# Altium PCB LaserControl.PcbDoc
Units mil, origin at the board's own origin, x right, y up, seen from the top; angles counter-clockwise.
Board outline 870 x 540 mil, 2 copper layers (Top Layer, Bottom Layer); 13 components, 8 nets, 34 pads, 0 vias.
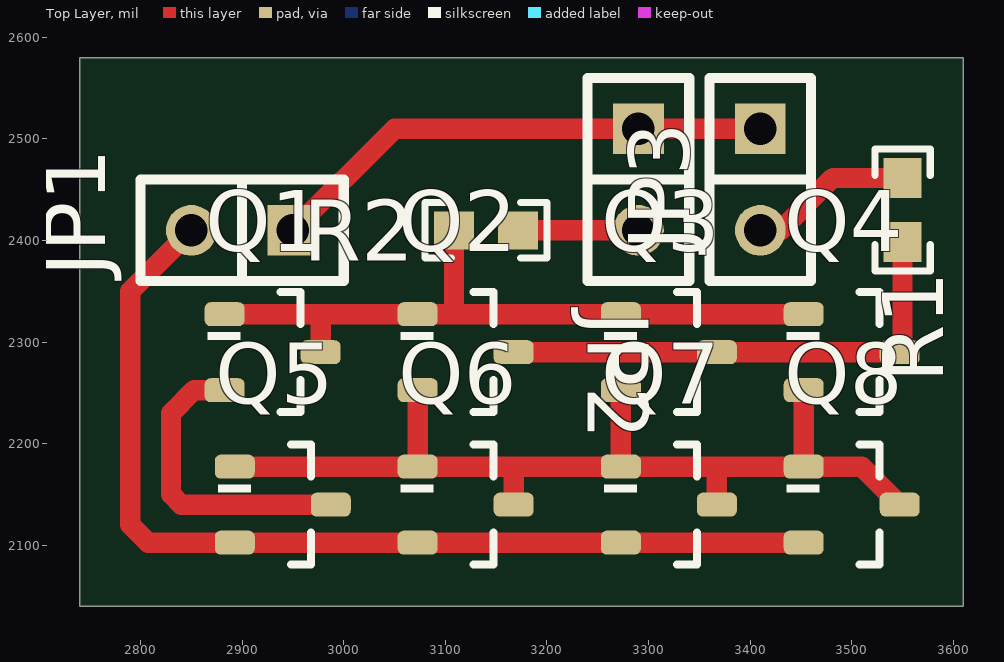
[diagram p0: Top Layer view]
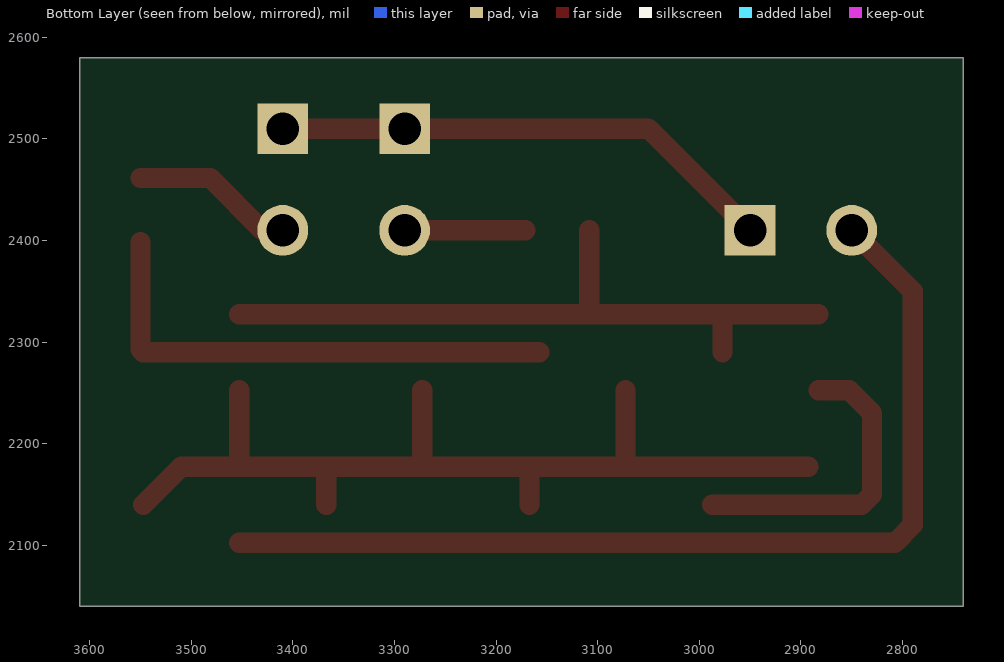
[diagram p1: Bottom Layer view, seen from below]
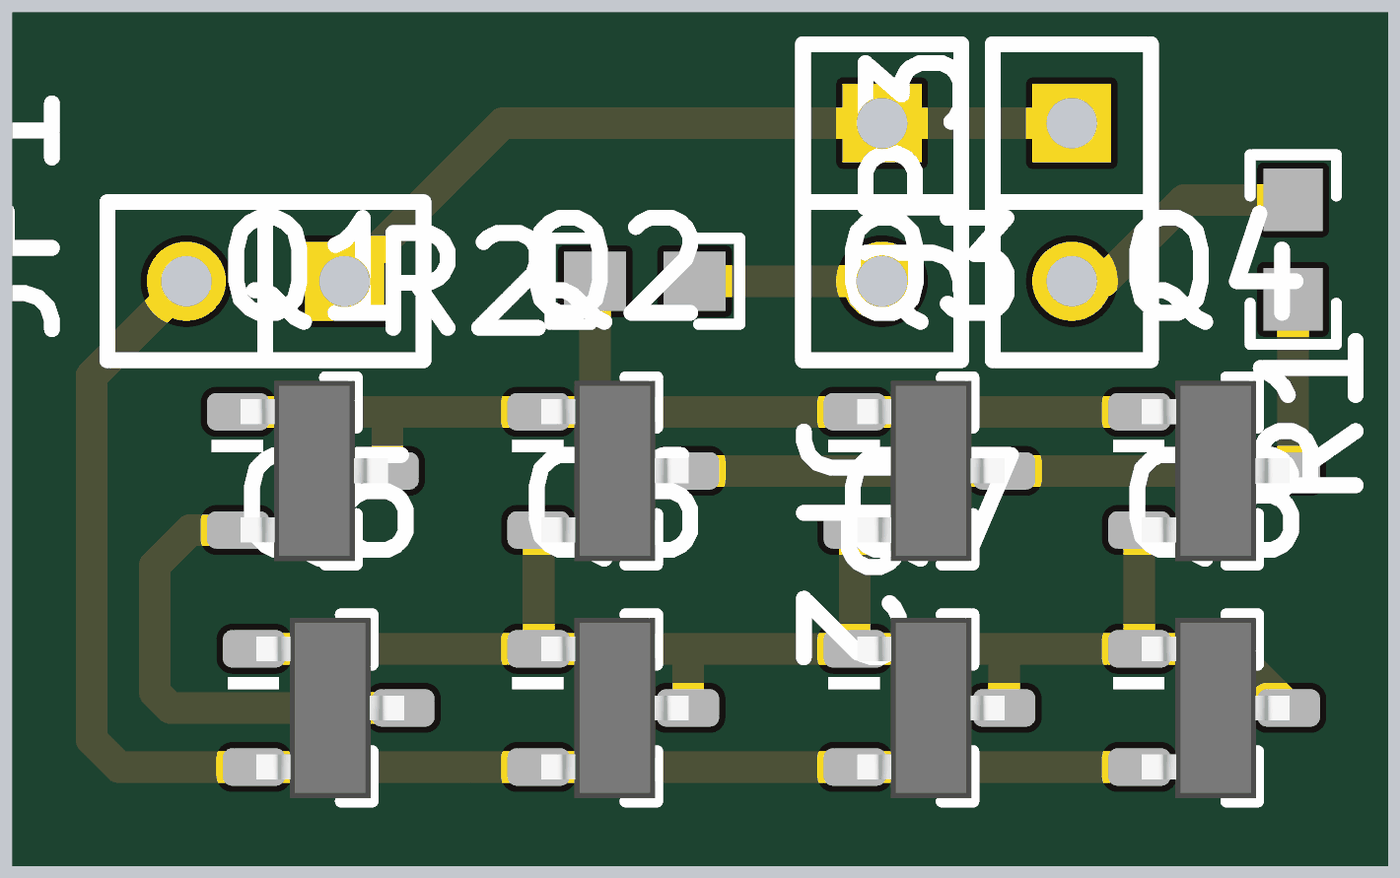
[diagram p2: 3D render of the assembled board from above, using the file's embedded part models]

## Layer stack, top to bottom
Top Layer: signal copper 1.4
Dielectric: dielectric 12.6, FR-4, Dk 4.8
Bottom Layer: signal copper 1.4

## Board outline
2740,2040 3610,2040 3610,2580 2740,2580

## Design rules (kind name [scope] priority, off if disabled: settings)
Clearance [All] p1: gap=10
PolygonConnect [All] p1: connectstyle=Relief reliefconductorwidth=10 reliefentries=4 polygonreliefangle="90 Angle"
RoutingVias [All] p1: holewidth=28 width=50 viastyle="Through Hole" minholewidth=28 minwidth=50 maxholewidth=28 maxwidth=50
SilkscreenOverComponentPads [All] p1: minsilkscreentomaskgap=10
SolderMaskExpansion [All] p1: expansion=4
Width [All] p1: maxlimit=100 minlimit=10 preferedwidth=10
27 further rules are at their usual default settings.

## Components (designator, comment, footprint, x,y, rotation, side; value= is the part's Value field where it differs from the comment)
JP1 "CON2" SIP2 2950,2410 r180 top
JP2 "CON2" SIP2 3290,2510 r270 top
JP3 "CON2" SIP2 3410,2510 r270 top
Q1 "MMBT4401-7-F" SOT-23 2930,2290 r0 top
Q2 "MMBT4401-7-F" SOT-23 3120,2290 r0 top
Q3 "MMBT4401-7-F" SOT-23 3320,2290 r0 top
Q4 "MMBT4401-7-F" SOT-23 3500,2290 r0 top
Q5 "MMBT4401-7-F" SOT-23 2940,2140 r0 top
Q6 "MMBT4401-7-F" SOT-23 3120,2140 r0 top
Q7 "MMBT4401-7-F" SOT-23 3320,2140 r0 top
Q8 "MMBT4401-7-F" SOT-23 3500,2140 r0 top
R1 "100R" 0603 3550,2430 r270 top
R2 "1K" 0603 3140,2410 r180 top

## Footprints (in the part's own frame and the unit in brackets; to place one, negate y for a bottom-side part, rotate by r counter-clockwise, add the part's x,y. Pads: shape width x height; smd on the part's side, far side on the other; paste and mask are expansions set on the pad)
0603 [mm] "0603 from SM-752 data"
  rect 1x0.95 smd: 1(-0.8,0) 2(0.8,0)
  silkscreen extent -1.52,-0.69 1.52,0.69, body extent -0.87,-0.47 0.87,0.47, height 1
SIP2 [mil]
  rect 50x50 hole 32: 1(0,0)
  round 50 hole 32: 2(100,0)
  silkscreen extent -50,-50 150,50
SOT-23 [mm] "SOT23, 3-Leads, Body 2.9x1.3mm, Pitch 0.95mm, Lead Span 2.5mm, IPC Medium Density"
  rrect50% 1x0.6 smd: 1(-1.2,0.95) 2(-1.2,-0.95) 3(1.2,0)
  silkscreen extent -1.63,-1.5 0.7,1.5, body extent -1.16,-1.45 1.21,1.45, height 1

## Part data
JP1 JP2 JP3: "Connector"
Q1 Q2 Q3 Q4 Q5 Q6 Q7 Q8: library part "MMBT4401-7-F, Diodes Inc.", "Transistor, NPN, 40 V, 0.15 A, SOT-23"
R1 R2: library part RC0603FR-07180RL

## Nets (pads, with @x,y where several pads share a name; then routed paths per layer and width w, separated by ;. In a path a pad name is that pad's centre, name@x,y a point inside that pad or via, vN(x,y) a via of type N, cw(c..) or ccw(c..) an arc to the next point about the centre after c; other vN are vias at no path point)
NetJP1_1: JP1.1 JP2.1 JP3.1 | length 501.4
  Top Layer w20: JP1.1 3050,2510 JP2.1 JP3.1
NetJP1_2: JP1.2 Q5.2 Q6.2 Q7.2 Q8.2 | length 984.8
  Top Layer w20: JP1.2 2790,2350 2790,2120 2807.4,2102.6 Q5.2 Q6.2 Q7.2 Q8.2
NetJP2_2: JP2.2 R2.1 | length 118.5
  Top Layer w20: R2.1 JP2.2
NetJP3_2: JP3.2 R1.1 | length 161.3
  Top Layer w20: JP3.2 3430,2410 3481.5,2461.5 R1.1
NetQ1_1: Q1.1 Q1.3 Q2.1 Q3.1 Q4.1 R2.2 | length 688
  Top Layer w20: Q1.1 Q2.1 Q3.1 Q4.1 ; Q1.3 2977.24,2326.89 ; 3108.5,2328.9 R2.2
NetQ1_2: Q1.2 Q5.3 | length 303.5
  Top Layer w20: Q1.2 2852.6,2252.6 2830,2230 2830,2150 2840,2140 Q5.3
NetQ2_2: Q2.2 Q3.2 Q4.2 Q5.1 Q6.1 Q6.3 Q7.1 Q7.3 Q8.1 Q8.3 | length 964.9
  Top Layer w20: Q5.1 Q6.1 ; Q2.2 Q6.1 ; Q6.3 3167.24,2174.65 ; Q3.2 Q7.1 ; Q7.3 3367.24,2174.65 ; Q4.2 Q8.1 ; Q8.3 3509.84,2177.4 Q8.1 ; Q6.1 Q7.1 ; Q7.1 Q8.1
NetQ2_3: Q2.3 Q3.3 Q4.3 R1.2 | length 499.6
  Top Layer w20: Q2.3@3157.24,2290 Q3.3 Q4.3 3550,2292.76 R1.2